# EAGLE board proiect_pcb v22 (EAGLE 9.7.0)
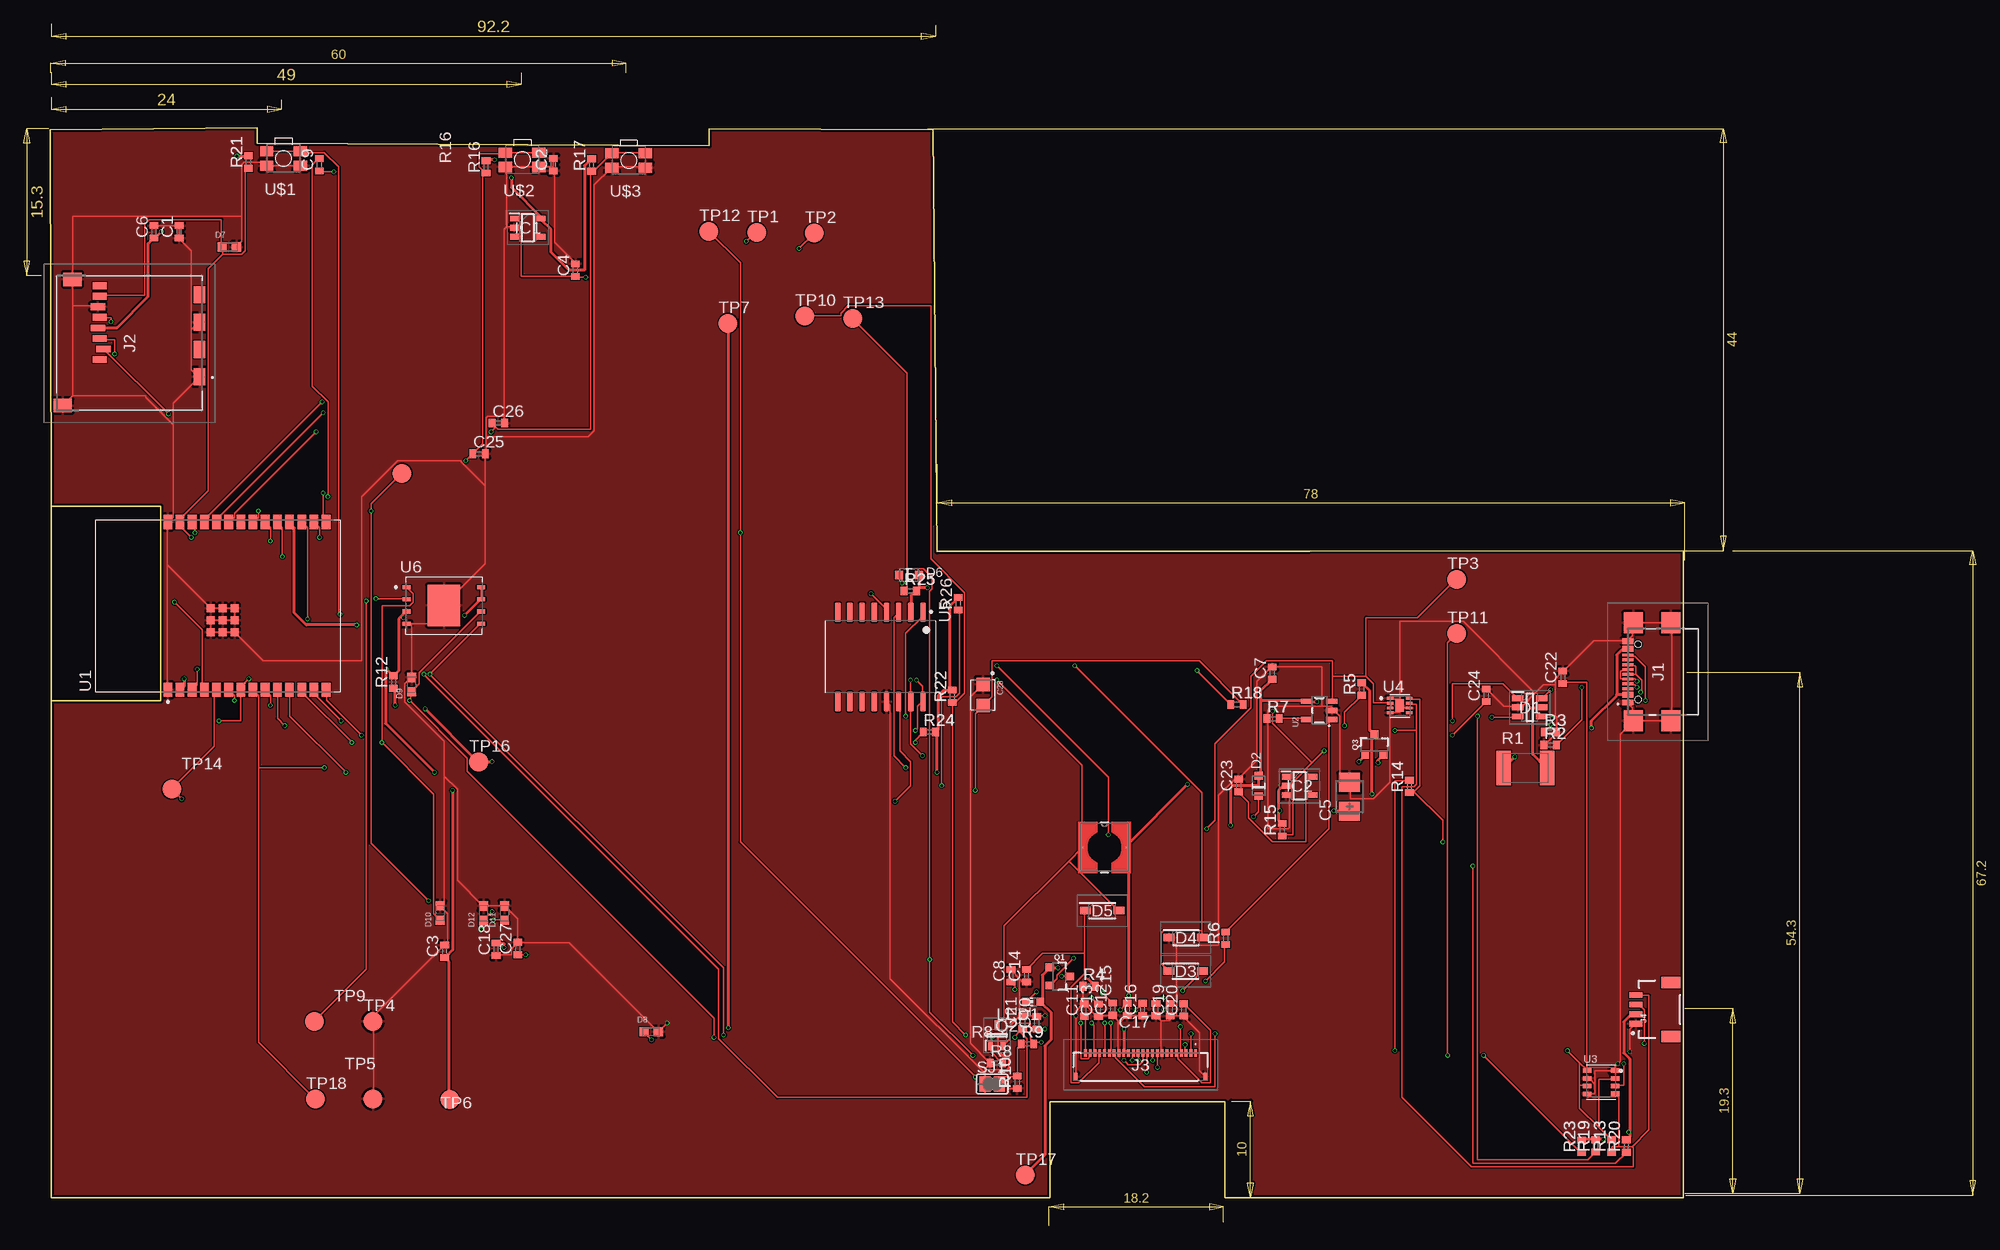
[diagram p0: board, top side]
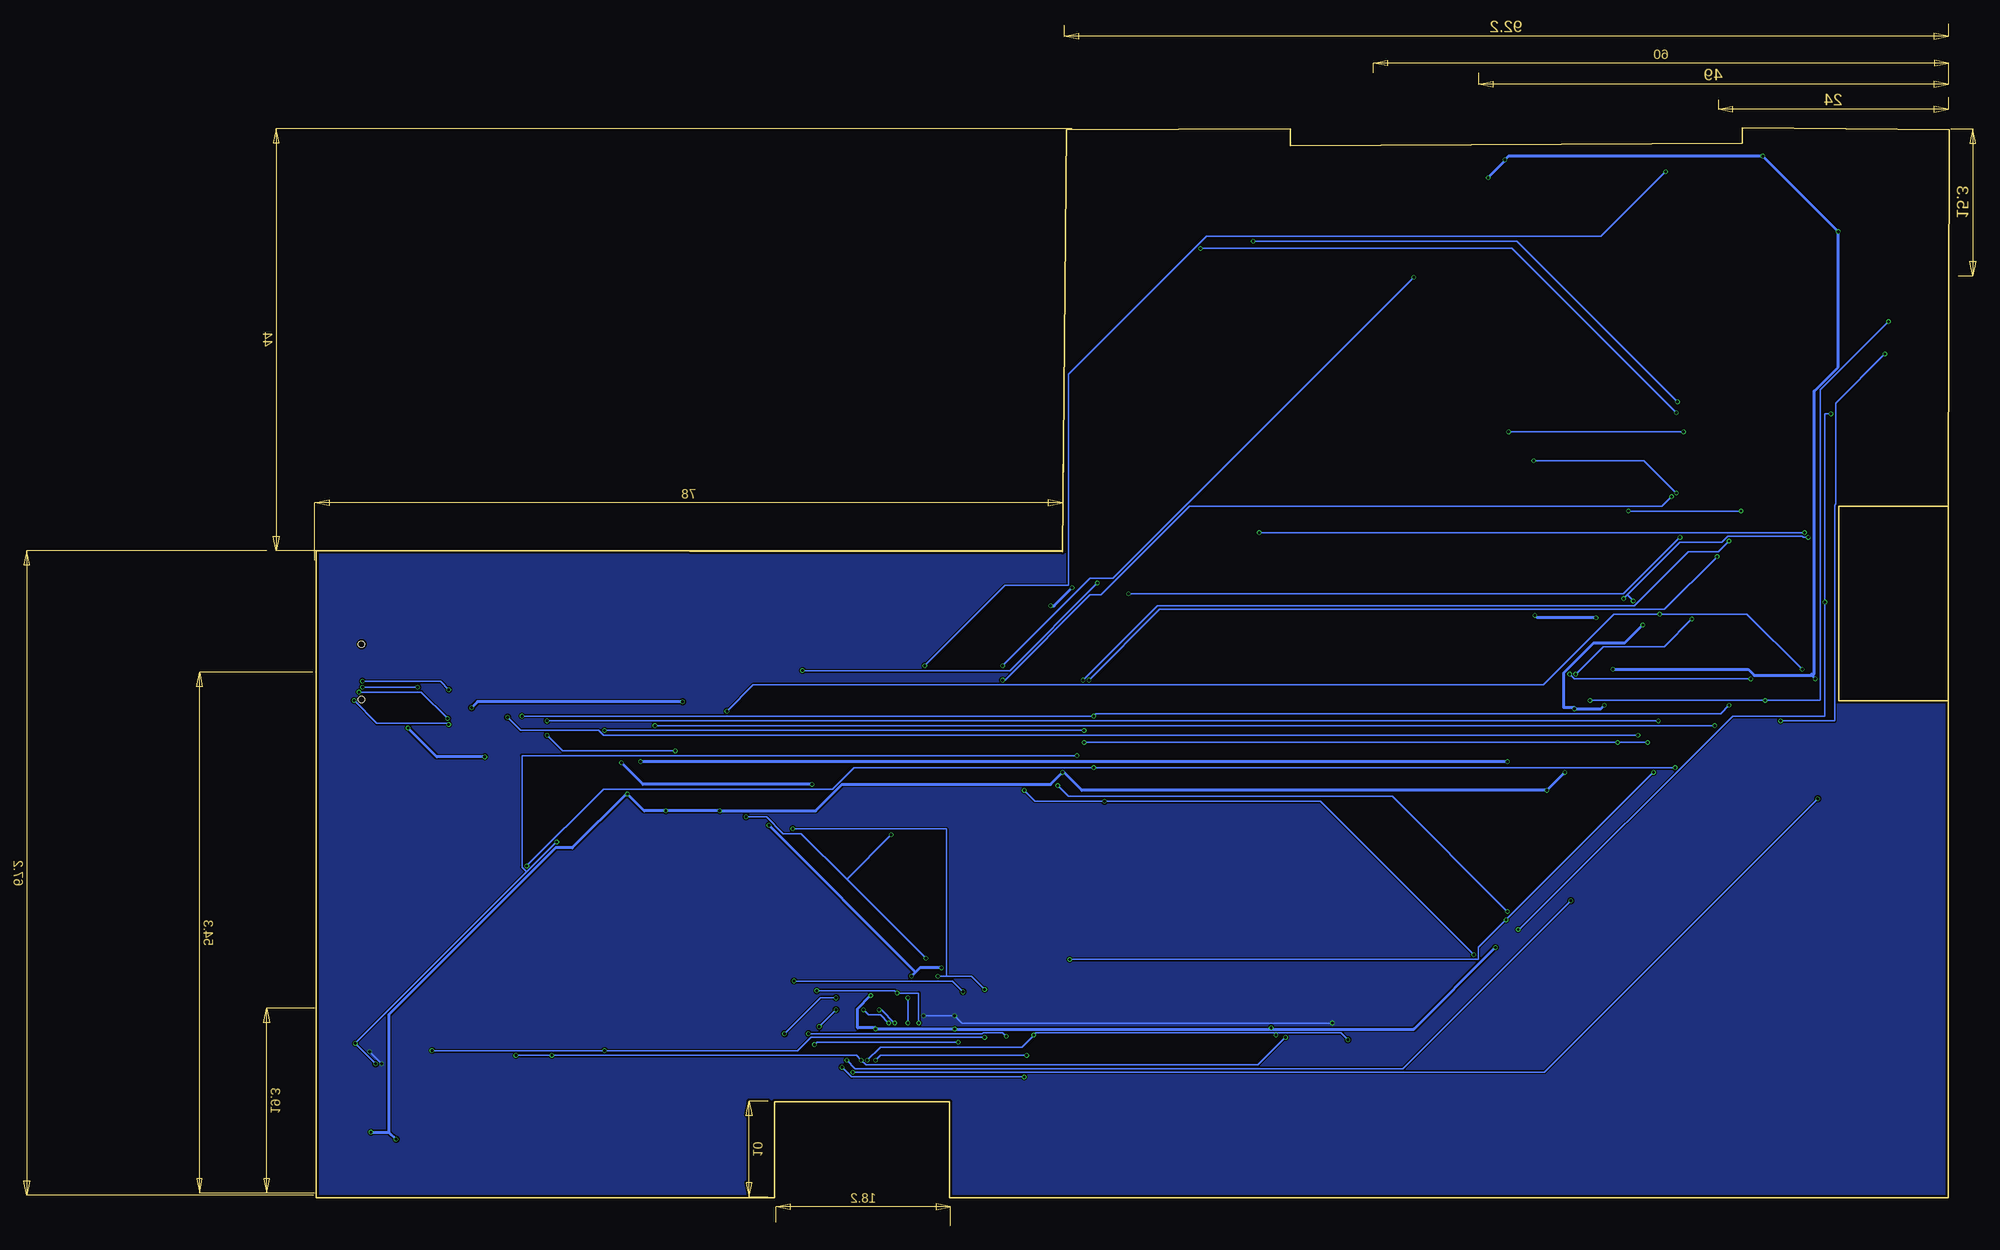
[diagram p1: board, bottom side, seen from below]

Size 170.31 x 111.58 mm. Coordinates in mm from the lower left corner, seen from the top.
Outline: 0.13,51.8 0.13,0 104.27,0 104.27,10.03 122.54,10.03 122.54,0 170.31,0 170.3,67.45 92.52,67.33 92.07,111.32 68.71,111.45 68.71,109.67 21.59,109.92 21.59,111.58 0,111.32 0.13,72.1
Outline: 0.13,51.8 0.13,72.1
Outline: 0.13,72.1 11.56,72.1 11.56,51.8 0.13,51.8
Copper layers (1*16): Top 0.035mm / dielectric 1.6mm / Bottom 0.035mm
Design rules "jlcpcb-2layers.dru": minimum track width 0.15mm, minimum drill 0.3mm, track to track 5mil, track to pad 5mil, pad to pad 5mil, via to via 5mil, smd to smd 5mil, copper to edge 0.2mm, drill to drill 6mil, minimum pad ring 10mil, minimum via ring 3mil, stop-mask expansion 4mil, vias tented up to drill 0mil, thermal gap 10mil
Net classes: 0 default: width 0.15 mm; 1 power: width 0.3 mm

## Footprints (pad centres in the part's own frame; a part is rotated, then mirrored left to right if it is on the bottom)
ESP32_WROVER_EAGLE-LTSPICE_C0402 = smd 0.7 x 0.9: 1 -0.65,0; 2 0.65,0
EAGLE-LTSPICE_C0402 = smd 0.7 x 0.9: 1 -0.65,0; 2 0.65,0
RCL_CT3528 = smd 2 x 2.2: + -1.5,0; - 1.5,0
CAPCP3225X100N = smd 1.4 x 1.4: 1 -1.1,0; 2 1.1,0
SOT95P280X145-6N = smd 1.2 x 0.6: 1 -1.25,0.95; 2 -1.25,0; 3 -1.25,-0.95; 4 1.25,-0.95; 5 1.25,0; 6 1.25,0.95
ESP32_WROVER_AVX---SD0805S020S1R0_AVX_SD0805S020S1R0_0 = smd 0.8 x 0.9: 1 -1.05,0; 2 1.05,0
SOD3716X135N = smd 1.15 x 0.8: 1 -1.75,0; 2 1.75,0
DIOC1608X36N = smd 0.97 x 0.94: 1 -0.75,0; 2 0.75,0
SOT95P280X120-5N = smd 0.9 x 0.6: 1 -1.4,0.95; 2 -1.4,0; 3 -1.4,-0.95; 4 1.4,-0.95; 5 1.4,0.95
SOT95P280X125-5N = smd 0.9 x 0.6: 1 -1.4,0.95; 2 -1.4,0; 3 -1.4,-0.95; 4 1.4,-0.95; 5 1.4,0.95
SAMACSYS_PARTS_USB4110GFA = smd 0.3 x 1.15: A1 -3.35,3.678; A4 -2.55,3.678; A5 -1.25,3.678; A6 -0.25,3.678; A7 0.25,3.678; A8 1.25,3.678; A9 2.55,3.678; A12 3.35,3.678; B1 3.05,3.678; B4 2.25,3.678; B5 1.75,3.678; B6 0.75,3.678; B7 -0.75,3.678; B8 -1.75,3.678; B9 -2.25,3.678; B12 -3.05,3.678 | smd 2.18 x 2: MP1 -5.11,-0.827; MP2 5.11,-0.827; MP3 -5.11,3.103; MP4 5.11,3.103 | hole 0.65: -2.89,2.603; 2.89,2.603
112ATAARR03ATTEND = smd 1.8 x 1.2: G1 10.6,10.4; G2 4.9,10.4; S1 7.75,10.4; S2 2.05,10.4 | smd 1.4 x 1.9: G3 13.6,-3.85; G4 0.45,-2.85 | smd 0.7 x 1.5: P1 8.8,0; P2 7.7,0.4; P3 6.6,0; P4 5.5,-0.2; P5 4.4,0; P6 3.3,-0.2; P7 2.2,0; P8 1.1,0
FH34SRJ24S05SH99 = smd 0.3 x 0.8: 1 5.75,1.45; 2 5.25,1.45; 3 4.75,1.45; 4 4.25,1.45; 5 3.75,1.45; 6 3.25,1.45; 7 2.75,1.45; 8 2.25,1.45; 9 1.75,1.45; 10 1.25,1.45; 11 0.75,1.45; 12 0.25,1.45; 13 -0.25,1.45; 14 -0.75,1.45; 15 -1.25,1.45; 16 -1.75,1.45; 17 -2.25,1.45; 18 -2.75,1.45; 19 -3.25,1.45; 20 -3.75,1.45; 21 -4.25,1.45; 22 -4.75,1.45; 23 -5.25,1.45; 24 -5.75,1.45 | smd 0.4 x 0.8: MP1 6.75,-1.05; MP2 -6.75,-1.05
JST04_1MM_RA = smd 0.6 x 1.35: 1 -1.5,0; 2 -0.5,0; 3 0.5,0; 4 1.5,0 | smd 1.2 x 2: NC1 2.8,-3.675; NC2 -2.8,-3.675
IND_4828-WE-TPC_WRE = smd 0.127 x 0.127: 1 -2.286,0; 2 2.286,0
ADAFRUIT_CHIP-LED0603 = smd 0.8 x 0.8: A 0,-0.75; C 0,0.75
ESP32_WROVER_SPARKFUN-DISCRETESEMI_SOT23-3 = smd 0.8 x 0.9: 1 -0.95,-1; 2 0.95,-1; 3 0,1.1
SOT65P210X110-3N = smd 1.05 x 0.5: 1 -1.05,0.65; 2 -1.05,-0.65; 3 1.05,0
ESP32C6_VARISTOR_CT/CN1812 = smd 1.5 x 3.6: 1 -2.25,0; 2 2.25,0
ESP32_WROVER_EAGLE-LTSPICE_R0402 = smd 0.7 x 0.9: 1 -0.65,0; 2 0.65,0
SJ = smd 1.168 x 1.6: 1 -0.762,0; 2 0.762,0
TP20R = smd 2 x 2: TP 0,0
XCVR_ESP32-C6-WROOM-1-N8 = smd 1.5 x 0.9: 1 -8.75,5.26; 2 -8.75,3.99; 3 -8.75,2.72; 4 -8.75,1.45; 5 -8.75,0.18; 6 -8.75,-1.09; 7 -8.75,-2.36; 8 -8.75,-3.63; 9 -8.75,-4.9; 10 -8.75,-6.17; 11 -8.75,-7.44; 12 -8.75,-8.71; 13 -8.75,-9.98; 14 -8.75,-11.25; 15 8.75,-11.25; 16 8.75,-9.98; 17 8.75,-8.71; 18 8.75,-7.44; 19 8.75,-6.17; 20 8.75,-4.9; 21 8.75,-3.63; 22 8.75,-2.36; 23 8.75,-1.09; 24 8.75,0.18; 25 8.75,1.45; 26 8.75,2.72; 27 8.75,3.99; 28 8.75,5.26 | smd 0.8 x 0.8: 29_1 -2.755,0.79; 29_2 -1.505,0.79; 29_3 -0.255,0.79; 29_4 -2.755,-0.46; 29_5 -1.505,-0.46; 29_6 -0.255,-0.46; 29_7 -2.755,-1.71; 29_8 -1.505,-1.71; 29_9 -0.255,-1.71
ESP32_WROVER_SPARKFUN-IC-POWER_SOT23-5 = smd 0.55 x 1.2: 1 -0.95,-1.3; 2 0,-1.3; 3 0.95,-1.3; 4 0.95,1.3; 5 -0.95,1.3
ESP32_WROVER_BME680_PSON80P300X300X100-8N = smd 1.016 x 0.5: 1 1.458,1.2; 2 1.458,0.4; 3 1.458,-0.4; 4 1.458,-1.2; 5 -1.458,-1.22; 6 -1.458,-0.4; 7 -1.458,0.4; 8 -1.458,1.2
SON50P200X200X80-9N = smd 0.76 x 0.27: 1 -0.985,0.75; 2 -0.985,0.25; 3 -0.985,-0.25; 4 -0.985,-0.75; 5 0.985,-0.75; 6 0.985,-0.25; 7 0.985,0.25; 8 0.985,0.75 | smd 0.9 x 1.3: 9 0,0
SOIC127P1032X265-16N = smd 2.05 x 0.59: 1 -4.655,4.445; 2 -4.655,3.175; 3 -4.655,1.905; 4 -4.655,0.635; 5 -4.655,-0.635; 6 -4.655,-1.905; 7 -4.655,-3.175; 8 -4.655,-4.445; 9 4.655,-4.445; 10 4.655,-3.175; 11 4.655,-1.905; 12 4.655,-0.635; 13 4.655,0.635; 14 4.655,1.905; 15 4.655,3.175; 16 4.655,4.445
SON127P600X800X80-9N = smd 0.94 x 0.44: 1 -3.895,1.905; 2 -3.895,0.635; 3 -3.895,-0.635; 4 -3.895,-1.905; 5 3.895,-1.905; 6 3.895,-0.635; 7 3.895,0.635; 8 3.895,1.905 | smd 3.4 x 4.3: 9 0,0
MYBUTTON = smd 1.4 x 1.05: 1 1.75,0.75; 2 -1.75,0.75; 3 -1.75,-0.75; 4 1.75,-0.75

## Placement (x,y rotation side)
C1  100nF  [ESP32_WROVER_EAGLE-LTSPICE_C0402]  13.47,100.7 90 top
C2  4.7uF  [ESP32_WROVER_EAGLE-LTSPICE_C0402]  52.5,107.7 90 top
C3  4.7uF  [EAGLE-LTSPICE_C0402]  41.15,25.7 90 top
C4  4.7uF  [EAGLE-LTSPICE_C0402]  54.8,96.7 90 top
C5  100uF  [RCL_CT3528]  135.5,41.81 90 top
C6  100nF  [ESP32_WROVER_EAGLE-LTSPICE_C0402]  10.85,100.7 90 top
C7  4.7uF  [ESP32_WROVER_EAGLE-LTSPICE_C0402]  127.45,54.7 90 top
C8  4.7uF  [ESP32_WROVER_EAGLE-LTSPICE_C0402]  100.21,23.15 90 top
C9  4.7uF/25V  [ESP32_WROVER_EAGLE-LTSPICE_C0402]  28.09,107.7 90 top
C10  10uF  [ESP32_WROVER_EAGLE-LTSPICE_C0402]  102.91,18.25 90 top
C11  1uF/50V  [ESP32_WROVER_EAGLE-LTSPICE_C0402]  107.83,19.58 90 top
C12  1uF/50V  [ESP32_WROVER_EAGLE-LTSPICE_C0402]  110.83,19.67 90 top
C13  1uF/50V  [ESP32_WROVER_EAGLE-LTSPICE_C0402]  109.33,19.56 90 top
C14  1uF/50V  [ESP32_WROVER_EAGLE-LTSPICE_C0402]  101.83,23.15 90 top
C15  1uF/50V  [ESP32_WROVER_EAGLE-LTSPICE_C0402]  112.33,19.64 90 top
C16  1uF/50V  [ESP32_WROVER_EAGLE-LTSPICE_C0402]  113.93,19.63 90 top
C17  1uF/50V  [ESP32_WROVER_EAGLE-LTSPICE_C0402]  115.33,19.62 90 top
C18  0.1uF/50V  [ESP32_WROVER_EAGLE-LTSPICE_C0402]  46.53,25.91 90 top
C19  1uF/50V  [ESP32_WROVER_EAGLE-LTSPICE_C0402]  116.83,19.6 90 top
C20  1uF/50V  [ESP32_WROVER_EAGLE-LTSPICE_C0402]  118.23,19.59 90 top
C21  100nF  [ESP32_WROVER_EAGLE-LTSPICE_C0402]  101.45,18.28 90 top
C22  100nF  [ESP32_WROVER_EAGLE-LTSPICE_C0402]  157.75,54.27 90 top
C23  100nF  [ESP32_WROVER_EAGLE-LTSPICE_C0402]  123.95,42.99 90 top
C24  1uF  [ESP32_WROVER_EAGLE-LTSPICE_C0402]  149.75,52.38 90 top
C25  100nF  [ESP32_WROVER_EAGLE-LTSPICE_C0402]  44.75,77.57 0 top
C26  100nF  [ESP32_WROVER_EAGLE-LTSPICE_C0402]  46.75,80.76 0 top
C27  100nF  [ESP32_WROVER_EAGLE-LTSPICE_C0402]  48.78,25.99 90 top
C28  CPH3225A  [CAPCP3225X100N]  97.3,52.43 270 top
D1  USBLC6-2SC6Y  [SOT95P280X145-6N]  154.31,51.13 0 top
D2  ESP32_WROVER_AVX---SD0805S020S1R0_AVX_SD0805S020S1R0_0_0AVX_SD0805S020S1R0_0_0  [ESP32_WROVER_AVX---SD0805S020S1R0_AVX_SD0805S020S1R0_0]  126.04,42.94 90 top
D3  MBR0530  [SOD3716X135N]  118.41,23.63 0 top
D4  MBR0530  [SOD3716X135N]  118.45,27.13 0 top
D5  MBR0530  [SOD3716X135N]  109.71,29.94 0 top
D6  ESP32_WROVER_AVX---SD0805S020S1R0_AVX_SD0805S020S1R0_0_0AVX_SD0805S020S1R0_0_0  [ESP32_WROVER_AVX---SD0805S020S1R0_AVX_SD0805S020S1R0_0]  89.58,64.93 0 top
D7  PGB1010603MR  [DIOC1608X36N]  18.7,99.12 0 top
D8  PGB1010603MR  [DIOC1608X36N]  62.7,17.31 0 top
D9  PGB1010603MR  [DIOC1608X36N]  37.7,53.5 90 top
D10  PGB1010603MR  [DIOC1608X36N]  40.7,29.69 90 top
D11  PGB1010603MR  [DIOC1608X36N]  47.4,29.68 90 top
D12  PGB1010603MR  [DIOC1608X36N]  45.2,29.67 90 top
IC1  XC6220A331MR-G  [SOT95P280X120-5N]  49.82,101.13 0 top
IC2  BD5229G-TR  [SOT95P280X125-5N]  130.29,42.95 0 top
J1  SAMACSYS_PARTS_USB4110-GF-A  [SAMACSYS_PARTS_USB4110GFA]  168.2,54.83 90 top
J2  112A-TAAR-R03_ATTEND  [112ATAARR03ATTEND]  5.19,96.19 270 top
J3  FH34SRJ-24S-0.5SH_99_  [FH34SRJ24S05SH99]  113.72,13.66 0 top
J4  QWIIC_RIGHT_ANGLE  [JST04_1MM_RA]  165.35,19.64 90 top
L1  68uH  [IND_4828-WE-TPC_WRE]  109.96,36.52 0 top
LED1  [ADAFRUIT_CHIP-LED0603]  102.52,20.43 90 top
Q1  20V/4.2A/52mΩ/1.4W  [ESP32_WROVER_SPARKFUN-DISCRETESEMI_SOT23-3]  105.25,23.08 270 top
Q2  SI1308EDL-T1-GE3  [SOT65P210X110-3N]  98.74,16.94 90 top
Q3  20V/4.2A/52mΩ/1.4W  [ESP32_WROVER_SPARKFUN-DISCRETESEMI_SOT23-3]  138.1,47.21 0 top
R1  ESP32C6_VARISTORCN1812  [ESP32C6_VARISTOR_CT/CN1812]  153.85,44.81 0 top
R2  5k1  [ESP32_WROVER_EAGLE-LTSPICE_R0402]  156.43,47.19 0 top
R3  5k1  [ESP32_WROVER_EAGLE-LTSPICE_R0402]  156.45,48.55 0 top
R4  100K  [ESP32_WROVER_EAGLE-LTSPICE_R0402]  108.36,22.05 0 top
R5  10K  [ESP32_WROVER_EAGLE-LTSPICE_R0402]  136.77,53.05 90 top
R6  200  [ESP32_WROVER_EAGLE-LTSPICE_R0402]  122.61,27.05 90 top
R7  2K  [ESP32_WROVER_EAGLE-LTSPICE_R0402]  127.54,49.95 0 top
R8  10K  [ESP32_WROVER_EAGLE-LTSPICE_R0402]  98.69,14.05 0 top
R9  0.47  [ESP32_WROVER_EAGLE-LTSPICE_R0402]  101.93,16.05 0 top
R10  2.2  [ESP32_WROVER_EAGLE-LTSPICE_R0402]  100.85,12.05 90 top
R12  10K  [ESP32_WROVER_EAGLE-LTSPICE_R0402]  35.83,53.78 90 top
R13  10K  [ESP32_WROVER_EAGLE-LTSPICE_R0402]  162.85,5.4 90 top
R14  10K  [ESP32_WROVER_EAGLE-LTSPICE_R0402]  141.75,42.89 90 top
R15  10K  [ESP32_WROVER_EAGLE-LTSPICE_R0402]  128.48,38.38 90 top
R16  10K  [ESP32_WROVER_EAGLE-LTSPICE_R0402]  45.48,107.47 90 top
R17  10K  [ESP32_WROVER_EAGLE-LTSPICE_R0402]  56.48,107.66 90 top
R18  15  [ESP32_WROVER_EAGLE-LTSPICE_R0402]  123.78,51.42 0 top
R19  10K  [ESP32_WROVER_EAGLE-LTSPICE_R0402]  161.18,5.41 90 top
R20  10K  [ESP32_WROVER_EAGLE-LTSPICE_R0402]  164.38,5.4 90 top
R21  10K  [ESP32_WROVER_EAGLE-LTSPICE_R0402]  20.7,107.99 90 top
R22  10K  [ESP32_WROVER_EAGLE-LTSPICE_R0402]  94.1,52.28 90 top
R23  10K  [ESP32_WROVER_EAGLE-LTSPICE_R0402]  159.7,5.37 90 top
R24  10K  [ESP32_WROVER_EAGLE-LTSPICE_R0402]  91.7,48.56 0 top
R25  10K  [ESP32_WROVER_EAGLE-LTSPICE_R0402]  89.7,63.25 0 top
R26  10K  [ESP32_WROVER_EAGLE-LTSPICE_R0402]  94.7,61.94 90 top
SJ1  [SJ]  98.25,11.86 0 top
TP1  TPTP20R  [TP20R]  73.7,100.64 0 top
TP2  TPTP20R  [TP20R]  79.7,100.56 0 top
TP3  TPTP20R  [TP20R]  146.7,64.48 0 top
TP4  TPTP20R  [TP20R]  33.7,18.4 0 top
TP5  TPTP20R  [TP20R]  33.7,10.32 0 top
TP6  TPTP20R  [TP20R]  41.7,10.24 0 top
TP7  TPTP20R  [TP20R]  70.7,91.16 0 top
TP9  TPTP20R  [TP20R]  27.6,18.4 0 top
TP10  TPTP20R  [TP20R]  78.7,91.92 0 top
TP11  TPTP20R  [TP20R]  146.7,58.84 0 top
TP12  TPTP20R  [TP20R]  68.7,100.76 0 top
TP13  TPTP20R  [TP20R]  83.7,91.68 0 top
TP14  TPTP20R  [TP20R]  12.7,42.6 0 top
TP15  TPTP20R  [TP20R]  36.7,75.52 0 top
TP16  TPTP20R  [TP20R]  44.7,45.44 0 top
TP17  TPTP20R  [TP20R]  101.7,2.36 0 top
TP18  TPTP20R  [TP20R]  27.7,10.28 0 top
U1  ESP32-C6-WROOM-1-N8  [XCVR_ESP32-C6-WROOM-1-N8]  17.54,61.71 90 top
U2  ESP32_WROVER_SPARKFUN-IC-POWER_MCP73831  [ESP32_WROVER_SPARKFUN-IC-POWER_SOT23-5]  132.37,50.81 90 top
U3  ESP32_WROVER_BME680_BME680  [ESP32_WROVER_BME680_PSON80P300X300X100-8N]  161.75,12.05 0 top
U4  MAX17048G+T10  [SON50P200X200X80-9N]  140.75,51.31 0 top
U5  DS3231SN#  [SOIC127P1032X265-16N]  86.59,56.39 270 top
U6  W25Q512JVEIQ  [SON127P600X800X80-9N]  41.08,61.75 0 top
U$1  BUTTON_CUSYOMV1  [MYBUTTON]  24.35,108.34 180 top
U$2  BUTTON_CUSYOMV1  [MYBUTTON]  49.25,108.21 180 top
U$3  BUTTON_CUSYOMV1  [MYBUTTON]  60.34,108.15 180 top

## Library data of the parts
C1-C4 C6-C27 = DeskAssistant_v19_v1; SPICEMODEL: NONE; SPICEPREFIX: C
C5 = DeskAssistant_v19_v1; SPICEPREFIX: C
C28 = DeskAssistant_v19_v1; AVAILABILITY: Not in stock; CHECK_PRICES: https://www.snapeda.com/parts/CPH3225A/Seiko+Instruments/view-part/?ref=eda; DESCRIPTION: 11 mF (EDLC) Supercapacitor 3.3 V 1210 (3225 Metric) - -; MF: Seiko Instruments; MP: CPH3225A; PACKAGE: 1210 Seiko; PRICE: None; PURCHASE-URL: https://www.snapeda.com/api/url_track_click_mouser/?unipart_id=562593&manufacturer=Seiko Instruments&part_name=CPH3225A&search_term=None; SNAPEDA_LINK: https://www.snapeda.com/parts/CPH3225A/Seiko+Instruments/view-part/?ref=snap
D1 = DeskAssistant_v19_v1; AVAILABILITY: In Stock; CHECK_PRICES: https://www.snapeda.com/parts/USBLC6-2SC6Y/STMicroelectronics/view-part/?ref=eda; DESCRIPTION: 17V Clamp 5A (8/20µs) Ipp Tvs Diode Surface Mount SOT-23-6; MF: STMicroelectronics; MP: USBLC6-2SC6Y; PACKAGE: SOT-23-6 STMicroelectronics; PRICE: None; SNAPEDA_LINK: https://www.snapeda.com/parts/USBLC6-2SC6Y/STMicroelectronics/view-part/?ref=snap
D2 D6 = DeskAssistant_v19_v1; CENTROID_NOT_SPECIFIED: No; DATASHEET: http://datasheets.avx.com/schottky.pdf; DIGIKEY_DESCRIPTION: DIODE SCHOTTKY 20V 1A 0805; DIGIKEY_PART_NUMBER: 478-7800-1-ND; LEAD_FREE: yes; MF: AVX; MOUSER_PART_NUMBER: 581-SD0805S020S1R0; PACKAGE: 0805 (2012 metric); PREFIX: D; ROHS: yes; TEMPERATURE_RANGE_HIGH: +125°C; TEMPERATURE_RANGE_LOW: -55°C
D3-D5 = DeskAssistant_v19_v1; AVAILABILITY: In Stock; CHECK_PRICES: https://www.snapeda.com/parts/MBR0530/Onsemi/view-part/?ref=eda; DESCRIPTION: Diode Schottky 30 V 500mA Surface Mount SOD-123; MF: ON Semiconductor; MP: MBR0530; PACKAGE: SOD-123-2 ON Semiconductor; PRICE: None; PURCHASE-URL: https://www.snapeda.com/api/url_track_click_mouser/?unipart_id=179458&manufacturer=ON Semiconductor&part_name=MBR0530&search_term=None; SNAPEDA_LINK: https://www.snapeda.com/parts/MBR0530/Onsemi/view-part/?ref=snap
D7-D12 = DeskAssistant_v19_v1; AVAILABILITY: In Stock; CHECK_PRICES: https://www.snapeda.com/parts/PGB1010603MR/Littelfuse/view-part/?ref=eda; DESCRIPTION: 150V (Typ) Clamp - Ipp Tvs Diode Surface Mount 0603 (1608 Metric); MF: Littelfuse Inc.; MP: PGB1010603MR; PACKAGE: 0603 Littelfuse Inc.; PRICE: None; PURCHASE-URL: https://www.snapeda.com/api/url_track_click_mouser/?unipart_id=5659453&manufacturer=Littelfuse Inc.&part_name=PGB1010603MR&search_term=None; SNAPEDA_LINK: https://www.snapeda.com/parts/PGB1010603MR/Littelfuse/view-part/?ref=snap
IC1 = DeskAssistant_v19_v1; DESCRIPTION: LDO Voltage Regulators; HEIGHT: 1.2mm; MANUFACTURER_NAME: Torex; MANUFACTURER_PART_NUMBER: XC6220A331MR-G; MOUSER_PART_NUMBER: 865-XC6220A331MR-G; MOUSER_PRICE-STOCK: https://www.mouser.co.uk/ProductDetail/Torex-Semiconductor/XC6220A331MR-G?qs=AsjdqWjXhJ8ZSWznL1J0gg%3D%3D
IC2 = DeskAssistant_v19_v1; DESCRIPTION: Voltage Detector with Adjustable Delay Time: CMOS processes are utilized to develop high precision, low current consumption CMOS reset ICs that allow arbitrary setting of the delay time. The extensive lineup includes both Nch Open Drain and CMOS output types in a wide range of detection voltages (from 2.3V to 6.0V, in 0.1V steps), enabling selection of the ideal solution based on customer requirements. In addition, the entire series is of course both lead-free and RoHS-compliant.; HEIGHT: 1.25mm; MANUFACTURER_NAME: ROHM Semiconductor; MANUFACTURER_PART_NUMBER: BD5229G-TR; MOUSER_PART_NUMBER: 755-BD5229G-TR; MOUSER_PRICE-STOCK: https://www.mouser.co.uk/ProductDetail/ROHM-Semiconductor/BD5229G-TR?qs=4kLU8WoGk0vvnhrrYwdszw%3D%3D
J1 = DeskAssistant_v19_v1; DESCRIPTION: CONN USB 2.0 TYPE-C R/A SMT; HEIGHT: 3.26mm; MANUFACTURER_NAME: GCT (GLOBAL CONNECTOR TECHNOLOGY); MANUFACTURER_PART_NUMBER: USB4110-GF-A; MOUSER_PART_NUMBER: 640-USB4110-GF-A; MOUSER_PRICE-STOCK: https://www.mouser.co.uk/ProductDetail/GCT/USB4110-GF-A?qs=KUoIvG%2F9IlYiZvIXQjyJeA%3D%3D
J2 = DeskAssistant_v19_v1; DESCRIPTION: Micro SD Card Socket, Push-Push Type, Top Mount, SMT, H=1.83mm, 10u; HEIGHT: 1.9mm; MANUFACTURER_NAME: ATTEND; MANUFACTURER_PART_NUMBER: 112A-TAAR-R03 ATTEND
J3 = DeskAssistant_v19_v1; DESCRIPTION: 24 Position FFC, FPC Connector Contacts, Top and Bottom 0.020" (0.50mm) Surface Mount, Right Angle; HEIGHT: 1.1mm; MANUFACTURER_NAME: Hirose; MANUFACTURER_PART_NUMBER: FH34SRJ-24S-0.5SH(99); MOUSER_PART_NUMBER: 798-FH34SRJ24S05SH99; MOUSER_PRICE-STOCK: https://www.mouser.co.uk/ProductDetail/Hirose-Connector/FH34SRJ-24S-0.5SH99?qs=vcbW%252B4%252BSTIpKBl5ap9J8Fw%3D%3D
J4 = DeskAssistant_v19_v1; PROD_ID: CONN-13694
L1 = DeskAssistant_v19_v1; COPYRIGHT: Copyright (C) 2024 Ultra Librarian. All rights reserved.; MANUFACTURER_PART_NUMBER: 744043680; MFR_NAME: Wurth Electronics
LED1 R1 SJ1 TP1-TP7 TP9-TP18 U$1-U$3 = DeskAssistant_v19_v1
Q1 Q3 = DeskAssistant_v19_v1; PROD_ID: TRAN-14388
Q2 = DeskAssistant_v19_v1; AVAILABILITY: In Stock; CHECK_PRICES: https://www.snapeda.com/parts/SI1308EDL-T1-GE3/Vishay+Siliconix/view-part/?ref=eda; DESCRIPTION: Si1308EDL-T1-GE3 N-channel MOSFET Transistor, 1.5 A, 30 V, 3-Pin SC-70 | Siliconix / Vishay SI1308EDL-T1-GE3; MF: Vishay Siliconix; MP: SI1308EDL-T1-GE3; PACKAGE: SOT-323 Vishay Semiconductor; PRICE: None; PURCHASE-URL: https://www.snapeda.com/api/url_track_click_mouser/?unipart_id=274603&manufacturer=Vishay Siliconix&part_name=SI1308EDL-T1-GE3&search_term=None; SNAPEDA_LINK: https://www.snapeda.com/parts/SI1308EDL-T1-GE3/Vishay+Siliconix/view-part/?ref=snap
R2-R10 R12-R26 = DeskAssistant_v19_v1; SPICEMODEL: NONE; SPICEPREFIX: R
U1 = DeskAssistant_v19_v1; AVAILABILITY: In Stock; CHECK_PRICES: https://www.snapeda.com/parts/ESP32-C6-WROOM-1-N8/Espressif+Systems/view-part/?ref=eda; DESCRIPTION: Multiprotocol Modules ESP32-C6 module, Wi-Fi 6 in 2.4 GHz band, Bluetooth 5, Zigbee 3.0 and Thread. ESP34-WROOM Compatible - ENGINEERING SAMPLE; MF: Espressif Systems; MP: ESP32-C6-WROOM-1-N8; PACKAGE: None; PRICE: None; SNAPEDA_LINK: https://www.snapeda.com/parts/ESP32-C6-WROOM-1-N8/Espressif+Systems/view-part/?ref=snap
U2 = DeskAssistant_v19_v1; PROD_ID: IC-09995
U3 = DeskAssistant_v19_v1; AVAILABILITY: Unavailable; DESCRIPTION: Integrated Environmental Unit; MF: Bosch Sensortec; MP: BME680; PACKAGE: LGA-8 Bosch Tools; PRICE: None
U4 = DeskAssistant_v19_v1; AVAILABILITY: In Stock; CHECK_PRICES: https://www.snapeda.com/parts/MAX17048G+T10/Analog+Devices/view-part/?ref=eda; DESCRIPTION: 3µA 1-Cell/2-Cell Fuel Gauge with ModelGauge; MF: Analog Devices; MP: MAX17048G+T10; PACKAGE: TDFN-8 Maxim; PRICE: None; PURCHASE-URL: https://www.snapeda.com/api/url_track_click_mouser/?unipart_id=329239&manufacturer=Analog Devices&part_name=MAX17048G+T10&search_term=None; SNAPEDA_LINK: https://www.snapeda.com/parts/MAX17048G+T10/Analog+Devices/view-part/?ref=snap
U5 = DeskAssistant_v19_v1; AVAILABILITY: In Stock; CHECK_PRICES: https://www.snapeda.com/parts/DS3231SN%23/Analog+Devices/view-part/?ref=eda; DESCRIPTION: Extremely Accurate I²C-Integrated RTC/TCXO/Crystal; MF: Analog Devices; MP: DS3231SN#; PACKAGE: SOIC-16 Maxim; PRICE: None; PURCHASE-URL: https://www.snapeda.com/api/url_track_click_mouser/?unipart_id=99048&manufacturer=Analog Devices&part_name=DS3231SN#&search_term=None; SNAPEDA_LINK: https://www.snapeda.com/parts/DS3231SN%23/Analog+Devices/view-part/?ref=snap
U6 = DeskAssistant_v19_v1; AVAILABILITY: In Stock; CHECK_PRICES: https://www.snapeda.com/parts/W25Q512JVEIQ/Winbond+Electronics/view-part/?ref=eda; DESCRIPTION: FLASH - NOR Memory IC 512Mb (64M x 8) SPI - Quad I/O 133 MHz 8-WSON (8x6); MF: Winbond Electronics; MP: W25Q512JVEIQ; PACKAGE: Package; PRICE: None; SNAPEDA_LINK: https://www.snapeda.com/parts/W25Q512JVEIQ/Winbond+Electronics/view-part/?ref=snap

## Nets
3V3 [power]: C3.1 C5.+ C6.1 D6.2 IC1.5 IC2.2 J2.P4 J4.2 Q3.3 R5.2 R12.2 R15.2 R16.2 R17.2 R19.2 R20.2 R21.2 R22.2 R23.2 R24.2 R25.2 R26.2 TP6.TP U1.2 U5.2 U6.3 U6.7 U6.8
32KHZ: R19.1 U1.9 U5.1
DN: D1.6 J1.A7 J1.B7
DP: D1.4 J1.A6 J1.B6
EPD_3V3 [power]: C10.1 C18.2 J3.15 J3.16 L1.2 Q3.2 TP7.TP
EPD_3V3_C [power]: Q3.1 R12.1 TP16.TP U1.18
EPD_BUSY: J3.9 TP12.TP U1.26
EPD_CS: D11.1 J3.12 R25.1 TP13.TP U1.11
EPD_DC: J3.11 TP14.TP U1.5
EPD_RST: J3.10 TP15.TP U1.21
FLASH_CS: D10.1 R24.1 U1.12 U6.1
GDR: J3.2 Q2.1 R8.2
GND: C1.1 C1.2 C2.1 C2.2 C3.2 C4.2 C5.- C6.2 C7.2 C8.2 C10.2 C11.2 C12.1 C13.1 C14.1 C15.1 C16.1 C17.1 C18.1 C19.1 C20.1 C21.2 C22.2 C23.2 C24.2 C25.2 C26.2 C27.2 C28.1 D1.2 D4.1 D7.2 D8.2 D9.2 D10.2 D11.2 D12.2 IC1.2 IC2.3 J1.A1 J1.A12 J1.B1 J1.B12 J1.MP1 J1.MP2 J1.MP3 J1.MP4 J2.G1 J2.G2 J2.G3 J2.G4 J2.P6 J3.8 J3.17 J3.MP1 J3.MP2 J4.1 R2.1 R3.2 R4.1 R7.1 R8.1 R10.1 SJ1.1 TP4.TP TP5.TP U1.1 U1.28 U1.29_1 U1.29_2 U1.29_3 U1.29_4 U1.29_5 U1.29_6 U1.29_7 U1.29_8 U1.29_9 U2.2 U3.1 U3.5 U3.7 U4.1 U4.4 U4.6 U4.9 U5.13 U6.4 U6.9 U$1.1 U$1.2 U$2.1 U$2.2 U$3.1 U$3.2
GPIO8: R5.1 U1.10
I2C_PW: C21.1 C22.1 R13.2 R14.2 U1.17 U3.2 U3.6 U3.8
INT_RTC: R20.1 TP18.TP U1.8 U5.3
IO/BOOT: C25.1 R16.1 U1.15 U$2.3 U$2.4
IO/CHANGE: C26.1 R17.1 U1.23 U$3.3 U$3.4
MISO: D7.1 J2.P7 R21.1 TP9.TP U1.27 U6.2
MOSI: D8.1 J2.P3 J3.14 R22.1 TP10.TP U1.7 U6.5
N$1: J1.A5 R2.2
N$2: J1.B5 R3.1
N$3: C11.1 J3.24
N$12: C4.1 D2.1 IC1.1 IC1.3 Q1.2
N$43: R6.2 U2.1
N$44: LED1.C R6.1
N$45: R7.2 U2.5
N$49: C9.1 D3.1 D4.2
N$60: C13.2 J3.22
N$62: C15.2 J3.20
N$63: C16.2 J3.19
N$64: C17.2 J3.18
N$66: C19.2 J3.4
N$75: C20.2 J3.5
N$85: C23.1 IC2.5
N$98: D6.1 R18.1
PREVGH: C14.2 D5.1 J3.21
PREVGL: C12.2 D3.2 J3.23
RESE: J3.3 Q2.2 R9.2
RESE': R9.1 R10.2 SJ1.2
RESET: C24.1 IC2.1 R15.1 U1.3 U$1.3 U$1.4
RTC_RST: U1.16 U5.4
RX: TP2.TP U1.24
SCK: D9.1 J2.P5 J3.13 R23.1 TP11.TP U1.6 U6.6
SCL: J4.4 R13.1 U1.20 U3.4 U4.7 U5.16
SDA: J4.3 R14.1 U1.19 U3.3 U4.8 U5.15
SRC: C9.2 D5.2 L1.1 Q2.3
SS_SD: D12.1 J2.P2 R26.1 U1.4
TX: TP1.TP U1.25
USB_D+: D1.3 U1.14
USB_D-: D1.1 U1.13
VBAT: C8.1 Q1.3 TP3.TP U2.3 U4.2 U4.3
VBUS [power]: C7.1 D1.5 D2.2 LED1.A Q1.1 R1.2 R4.2 TP17.TP U2.4
VRTC: C27.1 C28.2 R18.2 U5.14
VUSB [power]: J1.A4 J1.A9 J1.B4 J1.B9 R1.1

## Tracks (layer width: path | path; a pad name or v marks a point on that pad's centre or on a via)
3V3  (via drill 0.3)
  Top 0.3: 90.61,63.59 90.36,63.34 R25.2 90.24,63.22 89.86,62.84 89.86,61.09 U5.2 | 90.61,63.59 90.61,64.84 D6.2 | 93.86,61.72 94.61,62.47 R26.2 | 93.86,61.72 93.86,52.97 R22.2 93.99,52.84 93.11,52.84 92.61,52.34 92.61,48.84 92.36,48.59 R24.2 92.36,48.47 92.49,48.34 v92.49,44.34 | v91.49,63.59 90.61,63.59 | v93.74,61.72 93.86,61.72 | R23.2 159.74,6.09 161.11,6.09 R19.2 161.24,6.09 v161.99,6.09 | 164.74,6.84 164.74,14.47 164.11,15.09 164.11,18.34 164.86,19.09 165.24,19.09 J4.2 | 164.74,6.84 164.74,6.34 164.49,6.09 R20.2 | v164.61,6.84 164.74,6.84 | R5.2 136.86,53.59 137.61,52.84 137.61,48.72 137.99,48.34 Q3.3 137.99,48.22 137.86,48.09 v137.86,42.09 | 128.11,40.34 128.11,42.47 128.49,42.84 128.86,42.84 IC2.2 | 128.11,40.34 128.11,39.34 128.36,39.09 R15.2 | v133.86,40.34 135.49,40.34 C5.+ | v128.24,40.34 128.11,40.34 | R17.2 56.36,108.22 55.74,107.59 55.74,96.72 54.11,96.72 52.24,98.59 52.24,100.97 51.24,101.97 IC1.5 51.24,102.22 48.11,105.34 v48.11,106.34 | J2.P4 4.99,90.72 6.99,90.72 10.24,93.97 10.24,99.47 10.74,99.97 C6.1 10.99,100.09 v11.61,100.72 | v19.49,108.59 20.61,108.59 R21.2 | v46.36,108.22 45.49,108.22 R16.2 | TP6.TP 41.61,10.34 41.61,24.59 41.24,24.97 C3.1 41.24,25.09 41.99,25.84 v41.99,42.47 | U6.8 44.99,63.59 44.99,62.47 U6.7 44.86,62.34 v43.24,60.72 | 36.68,60.66 37.11,61.09 U6.3 | 36.68,60.66 36.36,60.34 36.36,54.97 35.86,54.47 R12.2 35.74,54.47 v35.11,55.09 34.99,55.09 34.99,49.47 v40.11,44.34 | 36.68,60.66 v36.86,60.47 | v13.99,54.09 13.99,53.34 13.61,52.97 U1.2
  Bottom 0.3: v91.49,63.59 93.36,61.72 v93.74,61.72 | 162.74,6.84 v161.99,6.09 | v164.61,6.84 162.74,6.84 | 162.74,6.84 162.74,19.09 145.36,36.47 143.61,36.47 137.99,42.09 v137.86,42.09 136.11,40.34 v133.86,40.34 v128.24,40.34 118.24,40.34 115.49,43.09 93.74,43.09 v92.49,44.34 92.36,44.34 90.49,42.47 v41.99,42.47 v40.11,44.34 | v48.11,106.34 46.36,108.09 v46.36,108.22 45.99,108.59 v19.49,108.59 v11.61,100.72 11.61,86.59 14.11,84.09 14.11,54.59 14.36,54.59 14.36,54.47 | v43.24,60.72 42.99,60.47 v36.86,60.47 | 14.36,54.47 v13.99,54.09 | 14.36,54.47 20.36,54.47 20.99,55.09 v35.11,55.09
32KHZ  (via drill 0.3)
  Top 0.15: v148.86,50.22 148.86,3.97 160.36,3.97 161.11,4.72 R19.1 | v89.24,50.22 89.24,58.84 90.99,60.59 90.99,60.97 U5.1 | v22.99,51.34 22.99,52.34 22.49,52.84 U1.9
  Bottom 0.15: v148.86,50.22 v89.24,50.22 88.99,50.47 23.86,50.47 v22.99,51.34
DN  (via drill 0.3)
  Top 0.15: J1.A7 164.49,54.97 163.86,54.97 163.74,54.84 163.74,54.09 164.49,54.09 J1.B7 164.61,54.09 165.24,54.09 v165.49,53.84 | v156.49,52.97 155.61,52.09 D1.6
  Bottom 0.15: v156.49,52.97 157.36,53.84 v165.49,53.84
DP  (via drill 0.3)
  Top 0.15: 165.36,54.59 164.61,54.59 J1.A6 | 165.36,54.59 165.36,55.34 165.24,55.47 164.61,55.47 J1.B6 | v156.61,49.97 156.61,50.09 155.61,50.09 D1.4 | v165.86,52.72 165.99,52.84 165.99,53.97 165.36,54.59
  Bottom 0.15: v156.61,49.97 159.36,52.72 v165.86,52.72
EPD_3V3  (via drill 0.3)
  Top 0.3: v138.49,45.34 138.49,45.59 138.99,46.09 Q3.2 | v118.61,43.09 112.24,36.72 112.24,36.47 | 112.24,36.47 L1.2 | J3.15 112.36,15.22 111.99,15.22 J3.16 111.99,15.34 v111.99,17.59 | v47.36,26.09 47.36,26.47 46.61,26.47 C18.2 | v103.74,17.59 102.99,17.59 C10.1 | v70.74,17.72 70.74,91.09 TP7.TP | v112.49,21.09 112.49,36.09 112.24,36.34 112.24,36.47
  Bottom 0.3: v138.49,45.34 136.24,43.09 v118.61,43.09 | v47.36,26.09 55.86,17.59 70.74,17.59 | 70.74,17.59 v103.74,17.59 v111.99,17.59 111.99,17.72 113.86,17.72 113.86,19.72 v112.49,21.09 | v70.74,17.72 70.74,17.59
EPD_3V3_C  (via drill 0.3)
  Top 0.3: R12.1 35.99,52.97 v35.99,51.34 | v39.11,50.97 44.61,45.47 TP16.TP 44.74,45.47 v46.11,45.47 | v136.49,45.47 137.11,46.09 Q3.1 | v31.99,59.72 26.74,59.72 25.49,60.97 25.49,69.84 24.99,70.34 U1.18
  Bottom 0.3: v35.99,51.34 36.36,50.97 v39.11,50.97 39.11,51.09 40.24,51.09 40.24,54.72 37.11,57.84 33.86,57.84 v31.99,59.72 | v46.11,45.47 v136.49,45.47
EPD_BUSY  (via drill 0.3)
  Top 0.15: v115.49,13.59 115.49,15.09 J3.9 | v96.49,12.59 71.99,37.09 v71.99,69.34 71.99,97.47 TP12.TP | v15.11,69.34 15.11,70.09 14.86,70.34 U1.26
  Bottom 0.15: v115.49,13.59 114.49,12.59 v96.49,12.59 | v71.99,69.34 v15.11,69.34
EPD_CS  (via drill 0.3)
  Top 0.15: v46.24,28.97 47.36,28.97 D11.1 | v30.86,44.34 24.99,50.22 24.99,52.84 U1.11 | v111.99,14.34 112.36,13.97 112.36,13.84 113.61,13.84 113.99,14.22 113.99,15.09 J3.12 | v96.24,14.84 91.74,19.34 v91.74,24.84 91.74,63.22 91.99,63.47 91.99,64.72 91.11,65.59 89.36,65.59 | 89.36,65.59 89.36,63.59 89.11,63.34 R25.1 | 89.36,65.59 89.36,85.97 83.74,91.59 TP13.TP
  Bottom 0.15: v30.86,44.34 v46.24,28.97 49.11,26.09 49.11,24.84 v91.74,24.84 | v111.99,14.34 111.49,14.84 v96.24,14.84
EPD_DC  (via drill 0.3)
  Top 0.15: v114.36,13.09 114.36,15.09 J3.11 | v13.74,41.59 12.74,42.59 TP14.TP 12.74,42.72 17.11,47.09 17.11,52.59 17.36,52.84 U1.5
  Bottom 0.15: v114.36,13.09 42.24,13.09 v13.74,41.59
EPD_RST  (via drill 0.3)
  Top 0.15: v114.99,14.34 114.99,15.09 J3.10 | v39.49,30.97 33.49,36.97 v33.49,71.59 33.49,72.34 36.61,75.47 TP15.TP | v21.74,71.59 21.74,70.97 21.24,70.47 U1.21
  Bottom 0.15: v114.99,14.34 114.11,13.47 56.99,13.47 v39.49,30.97 | v33.49,71.59 v21.74,71.59
FLASH_CS  (via drill 0.3)
  Top 0.15: v90.24,47.47 90.24,47.72 90.99,48.47 R24.1 | v31.49,47.47 26.36,52.59 26.36,52.84 U1.12 | U6.1 37.24,63.59 37.86,62.97 37.86,62.09 37.49,61.72 34.61,61.72 v34.61,47.47 39.99,42.09 39.99,29.59 40.61,28.97 D10.1
  Bottom 0.15: v31.49,47.47 v34.61,47.47 v90.24,47.47
GDR  (via drill 0.3)
  Top 0.15: v118.99,17.09 118.99,15.22 J3.2 | v98.36,16.84 98.11,16.59 98.11,15.97 Q2.1 98.11,15.84 98.11,15.22 99.24,14.09 R8.2
  Bottom 0.15: v118.99,17.09 100.86,17.09 100.74,17.22 98.74,17.22 v98.36,16.84
GND  (via drill 0.3)
  Top 0.15: C24.2 149.86,52.97 151.61,51.22 152.99,51.22 D1.2 153.11,51.22 153.61,51.22 153.61,51.34 154.86,52.59 | R2.1 155.86,47.22 156.99,48.34 156.99,48.47 R3.2 157.11,48.59 157.11,50.09 156.99,50.22 156.99,53.47 | 156.99,53.47 156.99,54.09 157.74,54.84 C22.2 157.86,54.97 160.99,58.09 164.49,58.09 | 154.86,52.59 155.74,53.47 156.99,53.47 | 161.11,11.84 161.11,10.84 160.36,10.84 U3.5 | 161.11,11.84 160.61,12.34 160.36,12.34 U3.7 | 161.11,11.84 161.11,13.22 163.11,13.22 U3.1 163.24,13.34 163.24,13.72 v163.49,13.97 163.74,14.22 163.74,48.34 164.99,49.59 J1.MP3 | v164.74,15.22 164.74,17.59 165.24,18.09 J4.1 | J1.B12 164.49,51.72 164.49,51.59 J1.A1 164.61,51.47 164.99,51.09 164.99,49.72 J1.MP3 | J1.MP3 165.11,49.72 168.99,49.72 J1.MP1 169.11,49.72 169.11,59.84 J1.MP2 168.99,59.97 165.11,59.97 J1.MP4 164.99,59.84 164.99,58.59 164.61,58.22 J1.A12 164.49,58.09 | 164.49,58.09 164.49,57.97 J1.B1 | C21.2 101.49,18.97 102.86,18.97 C10.2 102.99,18.97 v103.74,18.97 | 101.11,22.84 101.36,22.59 101.74,22.59 C14.1 | 101.11,22.84 100.24,23.72 C8.2 | 101.24,19.09 101.11,19.22 101.11,22.84 | 101.24,19.09 101.36,18.97 C21.2 | R10.1 100.74,11.34 99.86,11.34 99.86,10.97 99.74,10.84 97.49,10.84 97.49,11.84 SJ1.1 97.49,11.97 97.49,12.97 | 97.49,12.97 97.49,13.34 | 97.49,13.34 97.49,13.47 97.99,13.97 R8.1 97.99,14.09 95.99,16.09 95.99,52.22 C28.1 | U5.13 87.61,51.34 87.61,22.84 97.49,12.97 | 101.24,19.09 98.86,16.72 98.86,15.34 99.49,14.72 99.99,14.72 99.99,13.59 99.74,13.34 97.49,13.34 | 101.24,19.09 C21.2 | J3.MP2 106.99,12.72 v106.99,18.97 106.99,19.47 107.74,20.22 C11.2 | R4.1 107.74,21.97 107.74,20.34 C11.2
  Top 0.15: 111.36,18.09 111.36,18.47 110.86,18.97 C12.1 110.74,18.97 109.36,18.97 C13.1 109.24,18.84 107.86,20.22 C11.2 | 111.36,18.09 111.36,15.22 J3.17 | 111.36,18.09 112.24,18.97 C15.1 112.36,18.97 113.86,18.97 C16.1 113.99,18.97 C17.1 115.36,18.97 115.86,18.47 | 115.86,18.47 115.86,15.22 J3.8 | J3.MP1 120.36,12.72 119.86,13.22 119.86,17.22 118.24,18.84 C20.1 118.11,18.97 117.49,18.97 | 117.49,18.97 116.86,18.97 C19.1 116.74,18.84 116.74,18.47 115.86,18.47 | 117.49,26.34 116.74,27.09 D4.1 | 117.49,18.97 117.49,26.34 | 140.74,51.09 140.74,51.22 U4.9 | 140.74,51.09 140.74,50.59 139.86,50.59 U4.4 139.74,50.47 139.74,43.34 137.99,41.59 135.61,41.59 135.61,43.22 C5.- 135.49,43.34 134.49,44.34 134.49,50.22 133.61,51.09 | 140.74,51.09 141.61,51.09 U4.6 | 140.74,51.09 U4.9 | 140.74,51.97 139.86,51.97 U4.1 | 140.74,51.97 140.74,51.34 U4.9 | 132.61,51.22 133.61,51.22 133.61,51.09 | 132.61,51.22 127.36,51.22 126.99,50.84 126.99,49.97 R7.1 126.99,49.84 126.99,38.47 129.11,38.47 129.24,38.59 129.24,41.72 128.99,41.97 IC2.3 | 133.61,51.09 133.61,50.84 U2.2 | 132.61,51.22 132.61,55.34 127.49,55.34 C7.2 127.36,55.34 125.86,53.84 125.86,45.59 123.99,43.72 C23.2 123.86,43.59 123.49,43.59 121.86,41.97 121.86,26.34 117.49,26.34 | 154.86,52.59 147.36,60.09 140.74,60.09 140.74,51.97 | 19.99,102.34 19.99,107.72 20.24,107.97 22.49,107.97 22.49,107.59 U$1.1 22.61,107.59 25.99,107.59 U$1.2 | 19.99,102.34 19.99,99.72 19.49,99.22 D7.2 | 2.36,92.97 4.86,92.97 J2.P6 | 2.36,92.97 2.36,95.72 J2.G4 2.36,95.84 2.36,102.34 19.99,102.34 | 2.36,83.59 1.36,82.59 J2.G3 | 2.36,92.97 2.36,83.59 | C6.2 10.86,101.34 13.36,101.34 C1.2 13.49,101.34 13.49,100.09 C1.1 13.49,99.97 14.74,98.72 14.74,90.47
  Top 0.15: 14.74,90.47 14.74,86.34 15.49,85.59 J2.G1 15.49,85.47 12.86,82.84 12.86,80.59 | 14.74,90.47 15.49,91.22 J2.G2 | 19.24,60.22 18.11,60.22 U1.29_5 17.99,60.22 16.86,60.22 U1.29_2 16.74,60.09 16.74,58.97 U1.29_1 16.86,58.97 17.99,58.97 U1.29_4 18.11,58.97 19.24,58.97 U1.29_7 19.36,58.84 22.24,55.97 32.49,55.97 32.49,73.09 36.24,76.84 42.86,76.84 42.86,76.72 45.36,74.22 | 19.24,60.22 19.24,61.34 U1.29_9 19.24,61.47 18.11,61.47 U1.29_6 17.99,61.47 16.86,61.47 U1.29_3 16.74,61.47 12.24,65.97 | 19.24,60.22 U1.29_8 | 12.24,65.97 12.24,70.34 U1.28 12.36,70.47 12.86,70.97 12.86,80.59 | 12.24,65.97 12.24,52.97 U1.1 | 2.36,83.59 9.99,83.59 9.99,83.47 12.86,80.59 | C18.1 46.61,25.34 48.11,25.34 48.11,25.97 48.74,26.59 C27.2 | C27.2 48.86,26.59 54.11,26.59 63.36,17.34 D8.2 63.49,17.34 v64.36,18.22 | C27.2 48.74,26.72 48.74,29.09 47.49,30.34 D11.2 47.36,30.47 45.24,30.47 D12.2 45.11,30.47 42.49,33.09 42.49,42.59 41.11,43.97 | TP5.TP 33.74,10.34 33.74,18.34 TP4.TP 33.74,18.47 33.74,18.97 41.11,26.34 C3.2 41.24,26.47 41.49,26.72 41.49,29.59 40.74,30.34 D10.2 40.74,30.47 41.11,30.84 41.11,43.97 | 47.61,101.22 48.36,101.22 IC1.2 | 47.61,101.22 47.61,107.34 U$2.1 47.61,107.47 U$2.2 51.11,107.47 52.49,107.47 | 52.49,107.47 C2.2 | 52.49,107.47 52.49,107.09 C2.1 52.61,106.97 52.61,99.59 54.74,97.47 C4.2 | 37.74,59.84 40.99,59.84 40.99,61.72 U6.9 41.11,61.84 45.36,66.09 45.36,74.22 | 37.74,59.84 U6.4 | 37.74,59.84 37.74,54.34 D9.2 37.61,54.22 36.99,53.59 36.99,51.72 41.11,47.59 41.11,43.97 | U$3.2 61.99,107.47 58.61,107.47 U$3.1 58.49,107.34 56.74,105.59 56.74,79.97 56.11,79.34 45.49,79.34
  Top 0.15: 45.49,79.34 45.49,81.34 45.61,81.47 47.36,81.47 | 45.49,79.34 45.49,77.59 C25.2 45.36,77.47 45.36,74.22 | 47.36,81.47 47.36,80.84 C26.2 | 47.61,101.22 47.36,100.97 47.36,81.47
  Bottom 0.15: v163.49,13.97 v164.74,15.22 | v106.99,18.97 v103.74,18.97 102.99,18.22 v64.36,18.22
  pour Top: -17.44,-13.45 189.41,-13.45 189.41,142.39 -17.44,142.39
  pour Bottom: -16.48,-13.45 189.41,-13.45 189.41,142.39 -17.44,142.39 -17.44,-12.5
GPIO8  (via drill 0.3)
  Top 0.15: v134.99,49.22 134.99,50.59 136.74,52.34 R5.1 | v24.49,49.22 23.74,49.97 23.74,52.84 U1.10
  Bottom 0.15: v24.49,49.22 v134.99,49.22
I2C_PW  (via drill 0.3)
  Top 0.15: 101.11,17.34 100.61,16.84 v100.61,16.72 | 101.11,17.34 101.36,17.59 C21.1 101.11,17.34 | 160.24,13.34 159.49,14.09 | 159.49,14.09 v158.24,15.34 | v140.24,15.34 140.24,43.47 141.74,43.47 R14.2 | 160.24,13.34 160.24,53.72 157.86,53.72 C22.1 | 160.24,13.34 U3.8 | 161.49,7.34 159.49,9.34 159.49,11.72 | 161.49,7.34 162.74,6.09 R13.2 | 159.49,14.09 159.49,11.72 | 159.49,11.72 160.24,11.72 U3.6 | 161.49,7.34 161.49,12.34 163.11,12.34 U3.2 | v26.86,60.34 26.86,69.84 26.36,70.34 U1.17 | v38.99,54.59 69.74,23.84 69.74,16.59 75.86,10.47 101.86,10.47 101.86,16.59 101.11,17.34
  Bottom 0.15: v100.61,16.72 118.74,16.72 120.11,15.34 v140.24,15.34 v158.24,15.34 | v26.86,60.34 29.74,57.47 36.11,57.47 v38.99,54.59
INT_RTC  (via drill 0.3)
  Top 0.15: 21.74,44.84 21.74,16.22 27.61,10.34 TP18.TP | 21.74,44.84 21.74,52.34 21.24,52.84 U1.8 | v148.36,34.59 148.36,3.59 163.24,3.59 164.36,4.72 R20.1 | v89.24,44.84 87.99,46.09 87.99,60.47 88.49,60.97 U5.3 | v28.61,44.84 21.74,44.84
  Bottom 0.15: v148.36,34.59 140.36,42.59 116.49,42.59 114.24,44.84 v89.24,44.84 v28.61,44.84
IO/BOOT  (via drill 0.3)
  Top 0.15: U$2.3 47.61,108.97 U$2.4 47.49,108.84 44.74,108.84 44.74,107.47 45.36,106.84 R16.1 45.36,106.72 45.11,106.47 45.11,78.59 44.11,77.59 C25.1 43.99,77.47 v43.36,76.84 | v28.49,73.47 28.49,70.72 28.74,70.47 U1.15
  Bottom 0.15: v28.49,73.47 31.86,76.84 v43.36,76.84
IO/CHANGE  (via drill 0.3)
  Top 0.15: 46.49,80.34 46.74,80.09 56.36,80.09 56.36,106.72 | 46.49,80.34 46.11,80.72 C26.1 | 56.36,106.72 56.36,106.97 R17.1 56.36,106.72 | 56.36,106.72 58.49,108.84 U$3.4 58.61,108.97 61.99,108.97 U$3.3 | v27.74,79.84 19.24,71.34 19.24,70.97 18.74,70.47 U1.23 | 46.49,80.34 v45.99,79.84
  Bottom 0.15: v45.99,79.84 v27.74,79.84
MISO  (via drill 0.3)
  Top 0.15: 17.99,98.34 19.99,98.34 20.36,98.72 20.36,106.97 20.61,107.22 R21.1 | 17.99,98.34 17.99,99.09 D7.1 17.86,99.22 17.86,101.97 10.36,101.97 9.86,101.47 9.86,94.09 5.24,94.09 J2.P7 | v33.99,62.47 37.11,62.47 U6.2 | v14.74,68.84 13.61,69.97 13.61,70.34 U1.27 13.61,70.47 13.61,70.84 16.49,73.72 16.49,96.84 17.99,98.34 | v32.99,62.22 32.99,23.84 27.61,18.47 TP9.TP
  Bottom 0.15: 33.61,62.84 28.11,68.34 23.74,68.34 23.11,68.97 15.36,68.97 15.24,68.84 v14.74,68.84 | 33.61,62.84 v33.99,62.47 | 33.61,62.84 v32.99,62.22
MOSI  (via drill 0.3)
  Top 0.15: v20.74,54.09 19.99,53.34 19.99,52.97 U1.7 19.86,52.84 19.86,49.72 v17.61,49.72 | U6.5 44.86,59.84 v39.61,54.59 70.24,23.97 v70.24,16.97 | v6.74,87.97 6.74,89.47 5.24,89.47 J2.P3 | v112.86,14.34 112.86,15.09 J3.14 | v95.49,16.97 94.11,18.34 94.11,51.34 | 94.11,51.34 94.11,51.59 R22.1 94.11,51.34 | v62.74,16.47 61.99,17.22 D8.1 | 94.11,51.34 95.36,52.59 95.36,63.09 91.86,66.59 91.86,92.97 83.24,92.97 82.49,92.22 82.49,91.97 78.74,91.97 TP10.TP
  Bottom 0.15: v39.61,54.59 39.11,54.09 v20.74,54.09 | v6.74,87.97 11.86,82.84 11.86,72.34 11.99,72.22 11.99,49.72 v17.61,49.72 | v112.86,14.34 111.49,15.72 96.74,15.72 v95.49,16.97 95.24,17.22 70.24,17.22 | v62.74,16.47 63.49,17.22 70.24,17.22 | 70.24,17.22 v70.24,16.97
N$1  (via drill 0.3)
  Top 0.15: v159.74,53.22 159.74,49.84 157.11,47.22 R2.2 | v165.49,53.22 165.24,53.47 164.61,53.47 J1.A5
  Bottom 0.15: v165.49,53.22 v159.74,53.22
N$2  (via drill 0.3)
  Top 0.15: v156.49,49.34 156.49,49.22 155.86,48.59 R3.1 | v166.36,51.84 166.36,55.34 165.24,56.47 164.61,56.47 J1.B5
  Bottom 0.15: v156.49,49.34 156.61,49.47 163.99,49.47 v166.36,51.84
N$3
  Top 0.15: J3.24 107.99,15.22 107.99,18.72 107.86,18.84 C11.1
N$12  (via drill 0.3)
  Top 0.15: 49.11,100.22 48.49,100.22 IC1.3 | 49.11,100.22 49.11,101.59 48.74,101.97 48.49,101.97 IC1.1 | 49.11,100.22 49.11,96.09 54.74,96.09 C4.1 54.86,95.97 v55.86,95.97 | v106.74,24.97 104.99,23.22 104.99,22.84 104.36,22.22 Q1.2 | v125.49,39.72 125.99,40.22 125.99,41.84 D2.1 | v98.74,55.47 110.36,43.84 v110.36,37.84
  Bottom 0.15: 114.99,33.22 119.74,37.97 121.61,37.97 123.36,39.72 v125.49,39.72 | 114.99,33.22 v106.74,24.97 | v55.86,95.97 87.24,64.59 89.61,64.59 v98.74,55.47 | 114.99,33.22 v110.36,37.84
N$43
  Top 0.15: R6.2 122.61,27.72 133.36,38.47 133.36,49.59 133.61,49.84 U2.1
N$44  (via drill 0.3)
  Top 0.15: v102.86,21.47 101.86,20.47 LED1.C | v120.49,22.59 122.49,24.59 122.49,26.34 R6.1
  Bottom 0.15: v102.86,21.47 103.99,22.59 v120.49,22.59
N$45
  Top 0.15: R7.2 128.24,49.97 130.99,49.97 U2.5
N$49  (via drill 0.3)
  Top 0.15: v29.61,106.97 28.11,106.97 C9.1 | v106.86,55.47 120.11,42.22 120.11,27.84 | 120.11,27.84 120.11,27.22 D4.2 | 120.11,27.84 116.11,27.84 115.86,27.59 115.86,24.47 116.61,23.72 D3.1
  Bottom 0.15: v29.61,106.97 36.36,100.22 77.49,100.22 91.86,85.84 91.86,63.84 98.49,63.84 v106.86,55.47
N$60  (via drill 0.3)
  Top 0.15: v108.61,18.22 108.86,17.97 108.86,15.22 J3.22 | v108.61,20.84 109.24,20.22 C13.2
  Bottom 0.15: v108.61,20.84 v108.61,18.22
N$62  (via drill 0.3)
  Top 0.15: v109.99,18.22 109.99,15.22 J3.20 | v111.61,19.59 112.24,20.22 C15.2
  Bottom 0.15: v109.99,18.22 111.36,19.59 v111.61,19.59
N$63  (via drill 0.3)
  Top 0.15: v110.61,18.22 110.61,15.34 110.49,15.22 J3.19 | v113.24,19.59 113.86,20.22 C16.2
  Bottom 0.15: v110.61,18.22 111.49,19.09 112.74,19.09 v113.24,19.59
N$64  (via drill 0.3)
  Top 0.15: v121.49,17.09 121.49,11.59 114.11,11.59 111.11,14.59 111.11,14.97 110.99,15.09 J3.18 | v116.11,20.84 115.36,20.84 115.36,20.34 C17.2
  Bottom 0.15: v121.49,17.09 117.74,20.84 v116.11,20.84
N$66  (via drill 0.3)
  Top 0.15: v117.86,17.84 117.86,15.22 J3.4 | v116.11,19.59 116.74,20.22 C19.2
  Bottom 0.15: v116.11,19.59 v117.86,17.84
N$75
  Top 0.15: J3.5 117.49,15.09 117.61,14.97 117.61,14.47 120.11,11.97 120.99,11.97 120.99,17.47 118.24,20.22 C20.2
N$85
  Top 0.15: C23.1 123.99,42.22 124.99,41.22 124.99,39.59 127.49,37.09 130.99,37.09 130.99,43.22 131.61,43.84 IC2.5
N$98  (via drill 0.3)
  Top 0.15: D6.1 88.86,64.59 v88.86,64.09 | v119.61,54.97 123.11,51.47 R18.1
  Bottom 0.15: v88.86,64.09 97.99,54.97 v119.61,54.97
PREVGH
  Top 0.15: 107.86,25.47 107.86,29.84 D5.1 | 107.86,25.47 107.86,23.34 106.49,21.97 106.49,11.97 107.24,11.97 109.36,14.09 109.36,15.09 J3.21 | 107.86,25.47 103.49,25.47 101.86,23.84 C14.2
PREVGL  (via drill 0.3)
  Top 0.15: v107.49,18.22 107.49,14.47 108.24,14.47 108.36,14.59 108.36,15.09 J3.23 | v109.74,21.34 110.74,20.34 C12.2 | v118.11,21.59 120.11,23.59 D3.2
  Bottom 0.15: v107.49,18.22 107.49,21.34 v109.74,21.34 109.99,21.59 v118.11,21.59
RESE  (via drill 0.3)
  Top 0.15: v118.36,15.97 118.36,15.22 J3.3 | 102.61,16.22 v103.36,16.22 | 102.61,16.22 102.61,16.09 R9.2 102.61,16.22 | 102.61,16.22 102.24,16.59 102.24,18.22 100.86,18.22 100.11,17.47 100.11,16.59 99.49,15.97 Q2.2
  Bottom 0.15: v118.36,15.97 118.11,16.22 v103.36,16.22
RESE'
  Top 0.15: SJ1.2 99.11,11.97 99.11,12.59 100.74,12.59 R10.2 100.86,12.72 100.86,15.59 101.24,15.97 R9.1
RESET  (via drill 0.3)
  Top 0.15: 129.61,43.34 129.61,37.84 128.49,37.84 R15.1 | 129.61,43.34 128.99,43.97 IC2.1 | v146.24,48.22 C24.1 | 129.61,43.34 131.61,45.34 | 131.61,45.34 v132.86,46.59 | U$1.4 22.61,109.09 25.99,109.09 U$1.3 26.11,108.97 28.61,108.97 30.11,107.47 30.11,60.97 v30.24,60.84 | v15.36,55.09 15.36,53.47 14.86,52.97 U1.3 | 131.61,45.34 127.49,49.47 v127.49,50.72
  Bottom 0.15: v146.24,48.22 144.61,46.59 v132.86,46.59 | v15.36,55.09 21.11,60.84 v30.24,60.84 34.99,60.84 42.36,53.47 124.74,53.47 v127.49,50.72
RTC_RST  (via drill 0.3)
  Top 0.15: v28.11,68.84 28.11,69.84 27.61,70.34 U1.16 | v85.61,62.97 87.11,61.47 87.11,61.09 U5.4
  Bottom 0.15: v28.11,68.84 33.99,62.97 v85.61,62.97
RX  (via drill 0.3)
  Top 0.15: v28.49,81.84 17.86,71.22 17.86,70.84 17.49,70.47 U1.24 | v78.11,98.97 79.61,100.47 TP2.TP
  Bottom 0.15: v28.49,81.84 45.61,98.97 v78.11,98.97
SCK  (via drill 0.3)
  Top 0.15: U6.6 44.86,61.09 38.49,54.72 38.49,53.59 37.74,52.84 D9.1 37.61,52.72 37.61,51.97 v37.49,51.84 43.49,45.84 43.49,44.47 69.24,18.72 v69.24,16.72 | v19.24,51.84 19.24,52.34 18.74,52.84 U1.6 | v6.36,91.34 6.36,91.72 5.24,91.72 J2.P5 | v113.49,14.34 113.49,15.09 J3.13 | v149.49,14.84 159.61,4.72 R23.1 | v145.74,14.84 145.74,57.84 146.61,58.72 TP11.TP
  Bottom 0.15: v37.49,51.84 v19.24,51.84 13.49,51.84 13.49,84.22 v6.36,91.34 | v149.49,14.84 v145.74,14.84 113.99,14.84 v113.49,14.34 112.99,13.84 72.11,13.84 v69.24,16.72
SCL  (via drill 0.3)
  Top 0.15: 142.49,48.72 142.49,43.09 142.24,42.84 140.99,42.84 140.99,10.47 148.24,3.22 165.11,3.22 165.11,5.22 164.99,5.34 | 142.49,48.72 142.49,51.47 141.74,51.47 U4.7 | 163.61,5.34 162.86,5.34 162.86,4.84 R13.1 | 163.61,5.34 164.99,5.34 | 163.61,5.34 163.61,10.47 163.24,10.84 U3.4 | 164.99,5.34 166.74,7.09 166.74,21.09 165.36,21.09 J4.4 | v22.99,68.47 22.99,69.84 22.49,70.34 U1.20 | v90.36,53.97 90.99,53.34 90.99,51.84 U5.16 90.99,51.72 90.49,51.22 90.49,48.97 v90.24,48.72 | v140.24,48.72 142.49,48.72
  Bottom 0.15: v22.99,68.47 24.11,67.34 27.24,67.34 32.86,61.72 82.61,61.72 v90.36,53.97 | v90.24,48.72 v140.24,48.72
SDA  (via drill 0.3)
  Top 0.15: 142.24,42.34 142.86,42.97 142.86,51.97 141.74,51.97 U4.8 | 142.24,42.34 141.86,42.34 R14.1 | v164.11,13.97 164.11,11.72 163.24,11.72 U3.3 | v166.24,16.09 166.24,19.59 165.74,20.09 165.36,20.09 J4.3 | 142.24,42.34 145.24,39.34 v145.24,37.09 | v24.24,66.84 24.24,69.84 23.74,70.34 U1.19 | v89.74,53.97 89.74,51.84 U5.15 89.74,51.72 89.74,47.34 v90.99,46.09
  Bottom 0.15: v164.11,13.97 v166.24,16.09 148.36,33.97 | 148.36,33.97 v145.24,37.09 | v24.24,66.84 29.74,61.34 82.36,61.34 v89.74,53.97 | 148.36,33.97 148.86,34.47 148.86,46.09 v90.99,46.09
SRC  (via drill 0.3)
  Top 0.15: v28.99,73.09 28.99,82.97 27.36,84.59 27.36,107.72 27.99,108.34 C9.2 | v98.74,53.97 107.61,45.09 107.61,36.47 | 107.61,36.47 106.24,35.09 | 106.24,35.09 99.49,28.34 99.49,18.84 98.74,18.09 Q2.3 | 107.61,36.47 L1.1 | 106.24,35.09 111.36,29.97 D5.2
  Bottom 0.15: v28.99,73.09 29.99,72.09 79.24,72.09 88.49,62.84 89.61,62.84 98.49,53.97 v98.74,53.97
SS_SD  (via drill 0.3)
  Top 0.15: v12.99,62.09 15.86,59.22 15.86,53.09 15.99,52.97 U1.4 | v12.36,81.72 5.61,88.47 J2.P2 | v92.99,42.97 92.99,52.22 94.49,52.22 94.86,52.59 94.86,61.09 94.74,61.22 R26.1 | v46.11,29.84 45.24,28.97 D12.1 45.11,28.84 45.11,28.09 v44.99,27.97
  Bottom 0.15: v12.36,81.72 12.99,81.72 v12.99,62.09 12.99,50.22 22.61,50.22 44.86,27.97 v44.99,27.97 | v92.99,42.97 91.86,41.84 58.11,41.84 v46.11,29.84
TX  (via drill 0.3)
  Top 0.15: v28.36,82.97 16.61,71.22 16.61,70.97 16.11,70.47 U1.25 | v72.61,99.72 73.61,100.72 TP1.TP
  Bottom 0.15: v28.36,82.97 45.11,99.72 v72.61,99.72
USB_D+  (via drill 0.3)
  Top 0.15: v150.36,50.09 152.99,50.09 D1.3 | v32.49,48.22 28.86,51.84 28.86,52.84 U1.14
  Bottom 0.15: v150.36,50.09 148.99,48.72 140.86,48.72 140.36,48.22 v32.49,48.22
USB_D-  (via drill 0.3)
  Top 0.15: v146.24,49.72 146.24,53.59 151.49,53.59 152.99,52.09 D1.1 | v30.36,49.72 27.61,52.47 27.61,52.84 U1.13
  Bottom 0.15: v30.36,49.72 v146.24,49.72
VBAT  (via drill 0.3)
  Top 0.15: C8.1 100.61,22.09 v100.61,21.72 | v105.49,23.09 106.24,23.09 Q1.3 | U4.3 139.86,51.09 139.86,51.47 U4.2 139.74,51.59 137.99,51.59 137.99,53.59 137.24,54.34 | 133.74,54.34 137.24,54.34 | 133.74,54.34 133.74,51.84 U2.3 | 137.24,54.34 137.24,60.47 142.61,60.47 146.61,64.47 TP3.TP | v120.61,38.47 121.49,39.34 121.49,47.34 125.24,51.09 125.24,54.34 126.86,55.97 133.74,55.97 133.74,54.34
  Bottom 0.15: v100.61,21.72 101.99,23.09 104.61,23.09 | v105.49,23.09 104.61,23.09 | 104.61,23.09 104.61,38.47 v120.61,38.47
VBUS  (via drill 0.3)
  Top 0.3: v108.24,23.09 108.24,22.84 108.99,22.09 R4.2 | v105.11,23.97 104.36,23.97 Q1.1 104.24,23.97 103.49,23.22 103.49,20.59 103.36,20.47 LED1.A 103.36,20.34 104.36,19.34 104.36,16.47 103.74,15.84 103.74,4.47 101.74,2.47 TP17.TP | 154.61,51.09 155.49,51.09 D1.5 | 154.61,51.09 154.61,46.22 155.99,44.84 R1.2 | 126.24,51.84 126.24,52.84 127.36,53.97 C7.1 | 126.24,51.84 126.24,44.22 126.11,44.09 D2.2 125.99,43.84 125.99,42.97 123.36,42.97 123.11,42.72 v123.11,38.84 | 126.24,51.84 130.99,51.84 U2.4 131.11,51.72 v132.11,51.72 | v154.11,51.09 154.61,51.09
  Bottom 0.3: 107.8,23.53 107.36,23.97 v105.11,23.97 | 107.8,23.53 v108.24,23.09 | v154.11,51.09 153.49,51.72 v132.11,51.72 | v123.11,38.84 107.8,23.53
VRTC  (via drill 0.3)
  Top 0.15: R18.2 124.36,51.47 119.86,55.97 98.24,55.97 98.24,52.22 97.36,51.34 C28.2 97.24,51.22 96.49,50.47 v96.49,42.47 | v49.61,25.34 48.86,25.34 C27.1 | v88.11,41.34 89.74,42.97 89.74,45.47 88.61,46.59 88.61,51.72 U5.14
  Bottom 0.15: v49.61,25.34 65.61,41.34 v88.11,41.34 95.36,41.34 v96.49,42.47
VUSB  (via drill 0.3)
  Top 0.3: J1.A4 164.49,52.34 164.49,52.47 J1.B9 164.36,52.47 163.36,52.47 | J1.A9 164.49,57.34 164.49,57.09 J1.B4 164.36,57.09 163.86,57.09 163.36,56.59 163.36,52.47 | v160.74,48.97 160.74,49.72 163.36,52.34 163.36,52.47 | v152.74,45.97 151.61,44.84 R1.1
  Bottom 0.3: v160.74,48.97 157.74,45.97 v152.74,45.97